# Altium PCB optoFast.PcbDoc
Units mil, origin at the board's own origin, x right, y up, seen from the top; angles counter-clockwise.
Board outline 900 x 1100 mil, 2 copper layers (Top Layer, Bottom Layer), stack 65.792 mil thick; 10 components, 6 nets, 23 pads, 0 vias.
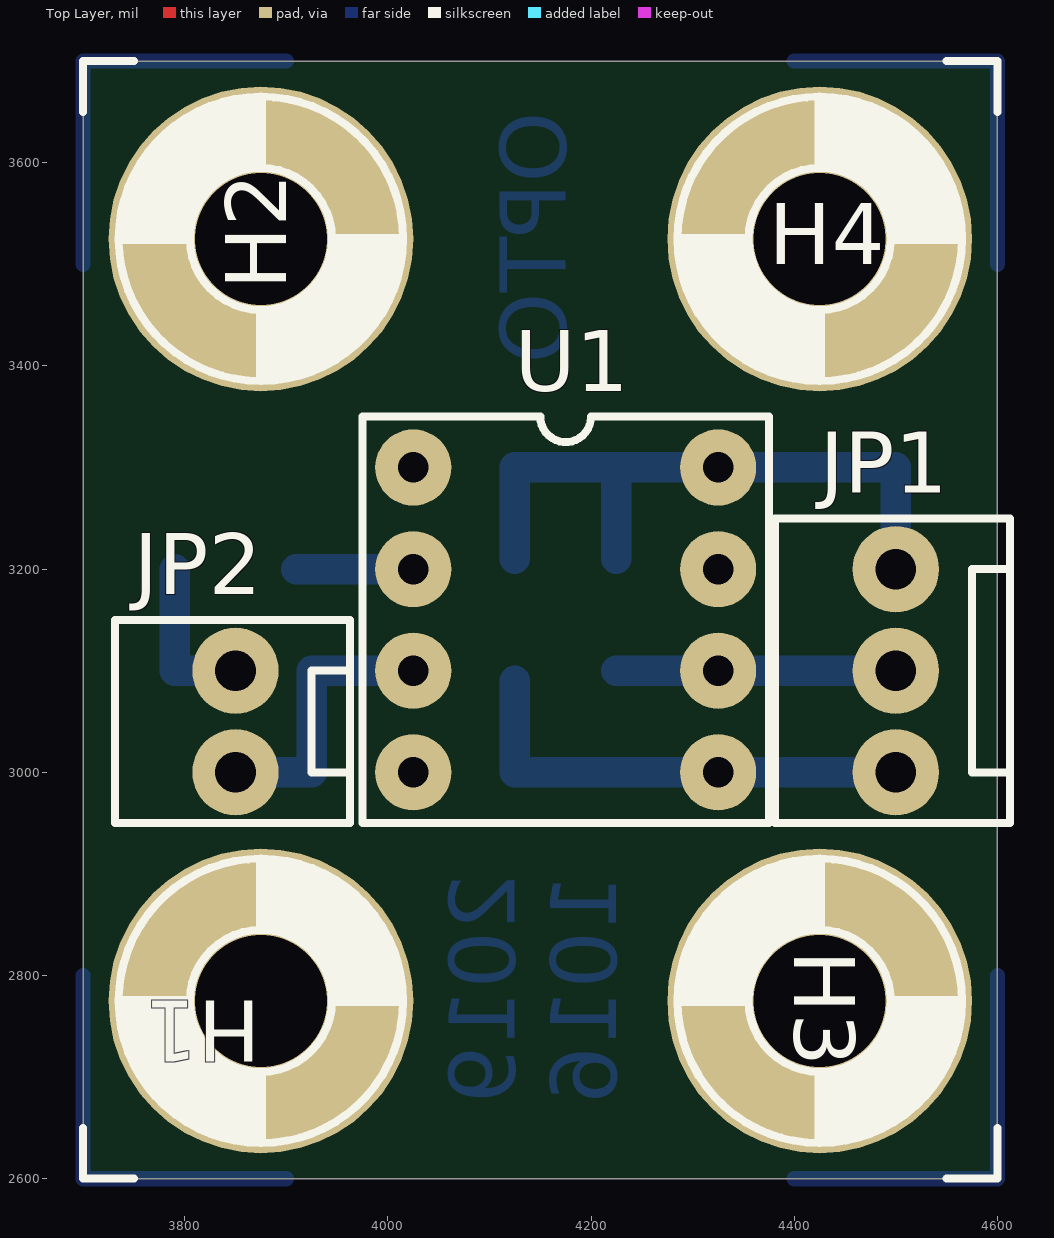
[diagram p0: Top Layer view]
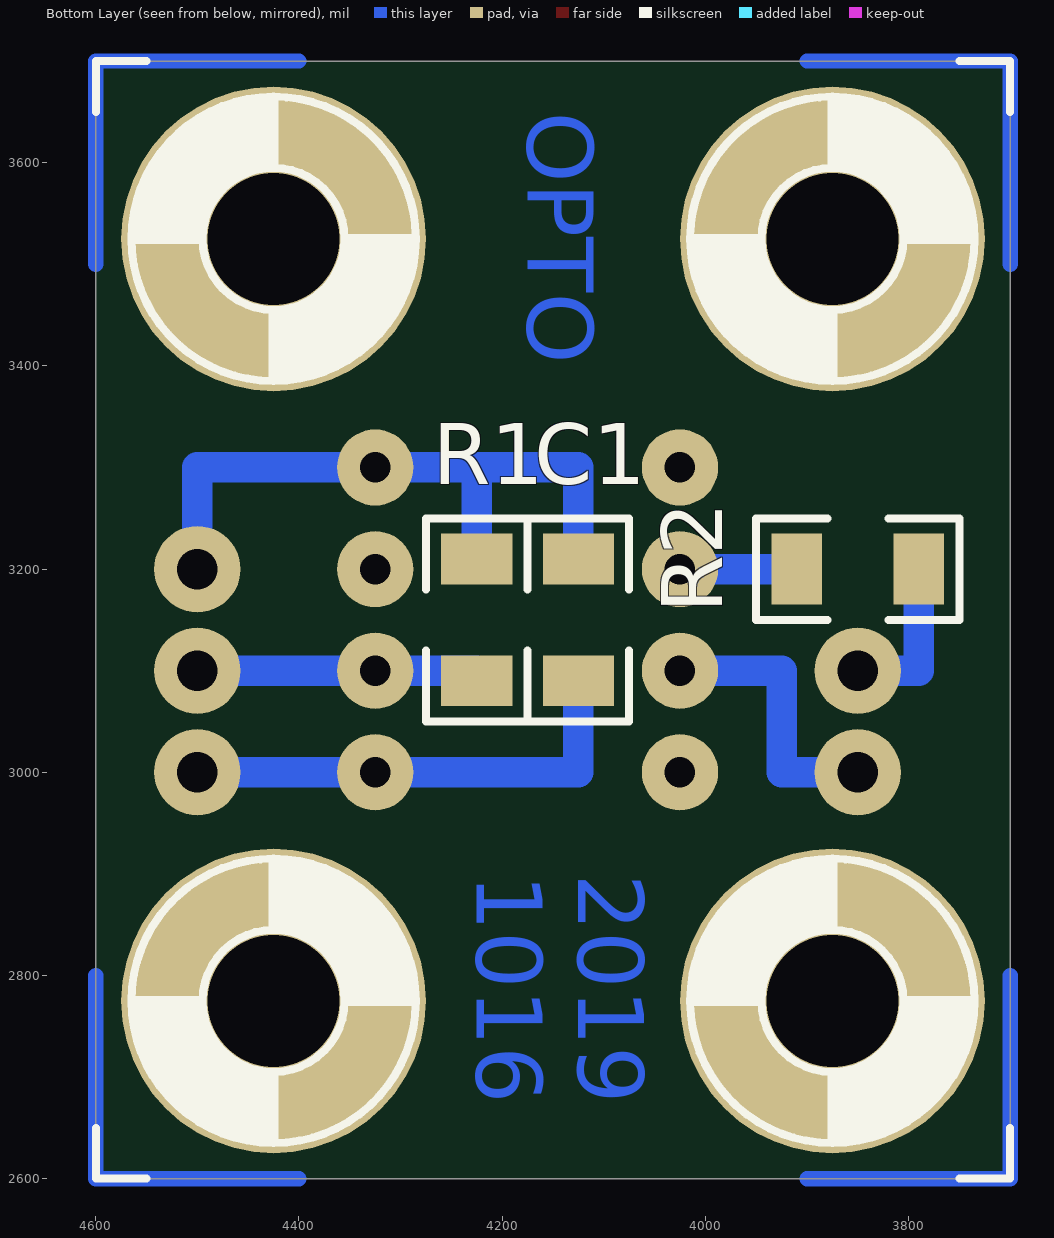
[diagram p1: Bottom Layer view, seen from below]
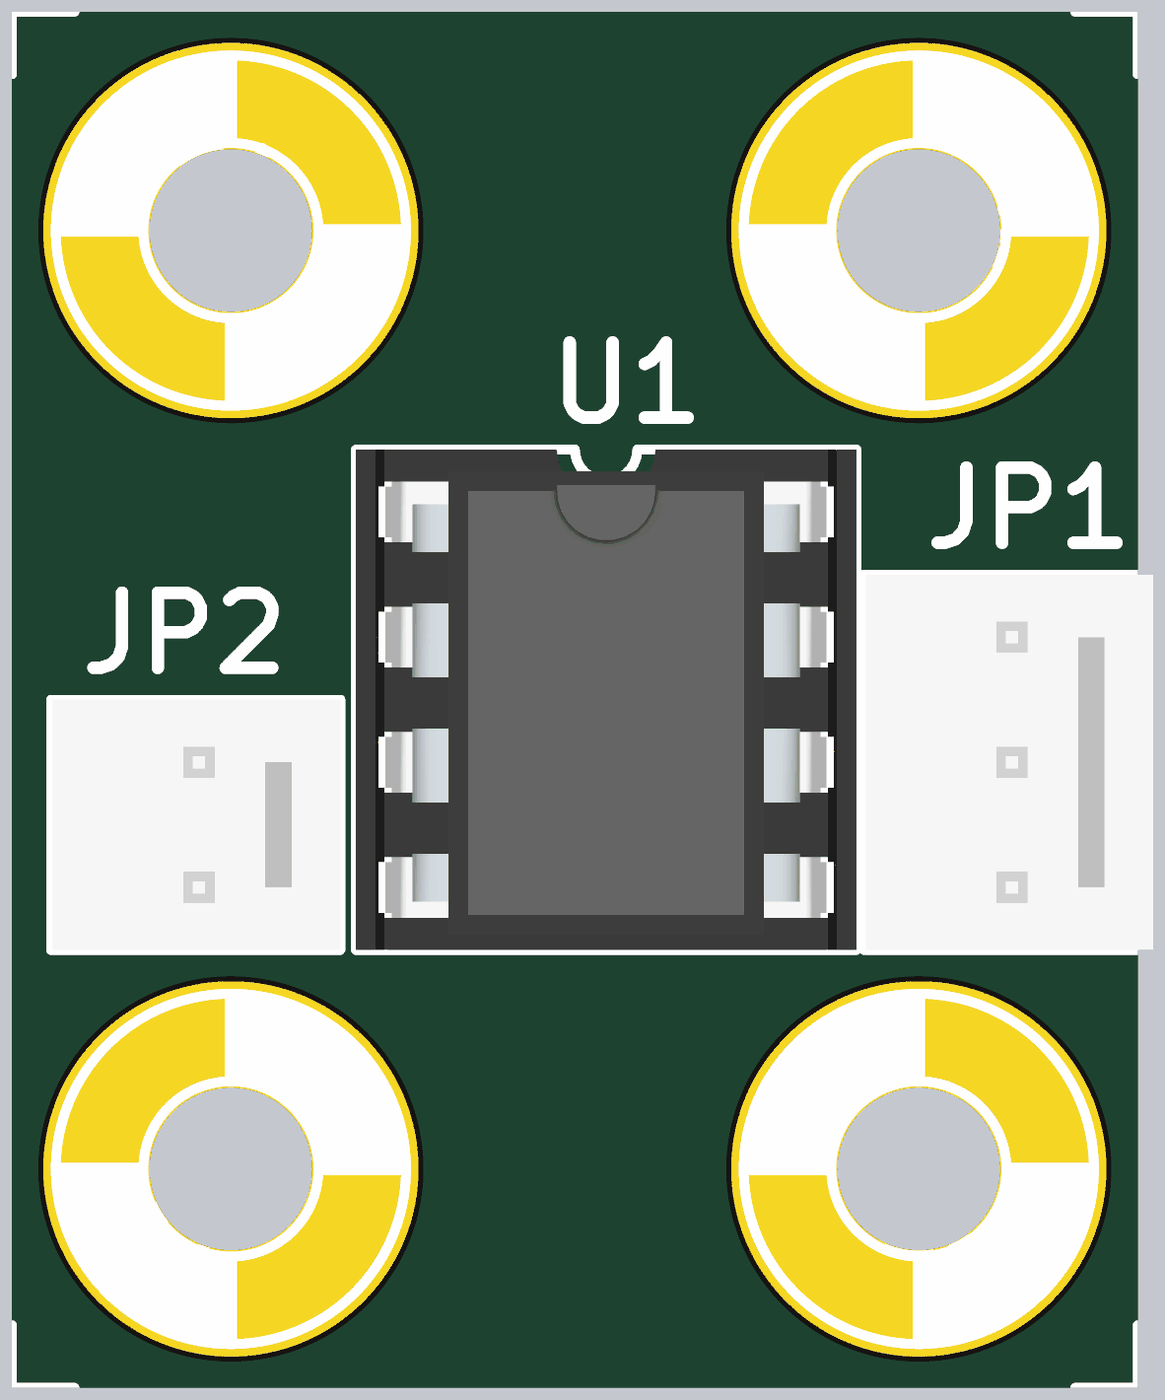
[diagram p2: 3D render of the assembled board from above, using the file's embedded part models]
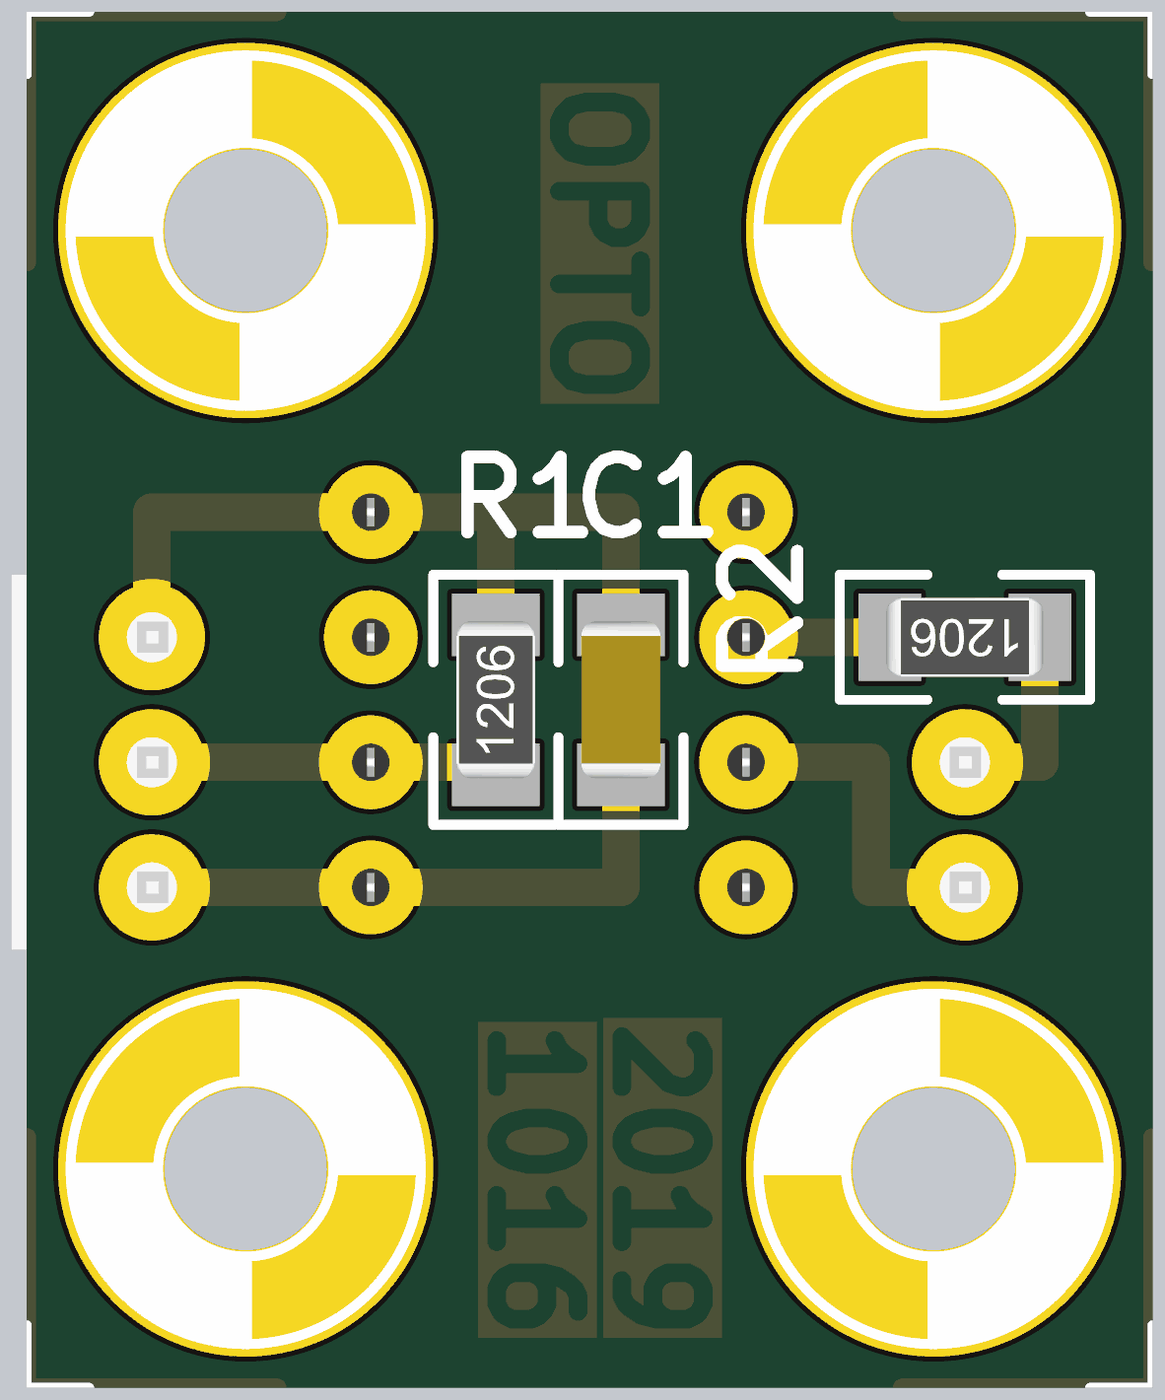
[diagram p3: 3D render of the assembled board from below, using the file's embedded part models]

## Layer stack, top to bottom
Top Layer: signal copper 1.4
Dielectric: core 62.9921, FR-4, Dk 4.8
Bottom Layer: signal copper 1.4

## Board outline
3700,2600 4600,2600 4600,3700 3700,3700

## Design rules (kind name [scope] priority, off if disabled: settings)
Clearance [All] p1: gap=20
PolygonConnect [All] p1: connectstyle=Relief reliefconductorwidth=25 reliefentries=4 polygonreliefangle="90 Angle"
RoomDefinition "PCB OPTO FAST" [InComponentClass('PCB OPTO FAST')] p1: confinementstyle=ConfineIn formatcopy=TRUE lockcomponents=FALSE outline 0,0 2000,0 2000,1000 0,1000
RoutingVias [All] p1: holewidth=28 width=50 viastyle="Through Hole" minholewidth=28 minwidth=50 maxholewidth=28 maxwidth=50
SilkscreenOverComponentPads [All] p1: minsilkscreentomaskgap=10
SolderMaskExpansion [All] p1: expansion=4
Width [All] p1: maxlimit=1000 minlimit=10 preferedwidth=20
27 further rules are at their usual default settings.

## Components (designator, comment, footprint, x,y, rotation, side; value= is the part's Value field where it differs from the comment)
C1 "Capacitor 1206; 100nF; 50V" C1206 4125,3150 r90 bottom
H1 "Agujero de Montaje" agujero 3875,2775 r180 top
H2 "Agujero de Montaje" agujero 3875,3525 r90 top
H3 "Agujero de Montaje" agujero 4425,2775 r270 top
H4 "Agujero de Montaje" agujero 4425,3525 r0 top
JP1 "Header3x1" conpol3x1 4500,3150 r270 top
JP2 "Header2x1" CONPOL2X1 3850,3050 r270 top
R1 "Res" R1206 4225,3150 r90 bottom
R2 "Res" R1206 3850,3200 r0 bottom
U1 "6N137" DIP8Z 4025,3300 r0 top

## Footprints (in the part's own frame and the unit in brackets; to place one, negate y for a bottom-side part, rotate by r counter-clockwise, add the part's x,y. Pads: shape width x height; smd on the part's side, far side on the other; paste and mask are expansions set on the pad)
agujero [mil] "AGUJERO DE MONTAJE"
  round 300 hole 130: 1(0,0)
  silkscreen extent -140,-140 175,175
C1206 [mil]
  rect 50x70 smd: 1(-60,0) 2(60,0)
  silkscreen extent -100,-50 100,50, body extent -63,-31 63,31, height 33
CONPOL2X1 [mil] "CONECTOR POLARIZADO 2x1"
  round 85 hole 40: 1(-50,0) 2(50,0)
  silkscreen extent -100,-119 100,113, body extent -100,-118 100,113, height 460
conpol3x1 [mil] "CONECTOR POLARIZADO 3x1"
  round 85 hole 40: 1(-50,0) 2(50,0) 3(150,0)
  silkscreen extent -100,-119 200,113, body extent -100,-118 200,113, height 460
DIP8Z [mil] "ZOCALO DIP 8"
  round 75 hole 30: 1(0,0) 2(0,-100) 3(0,-200) 4(0,-300) 5(300,-300) 6(300,-200) 7(300,-100) 8(300,0)
  silkscreen extent -50,-350 350,50, body extent -50,-350 350,50, height 311
R1206 [mil]
  rect 50x70 smd: 1(-60,0) 2(60,0)
  silkscreen extent -100,-50 100,50, body extent -63,-31 63,31, height 34

## Part data
JP1: "Header 3x1"
JP2: "Header 2x1"
R1 R2: "Resistor"
U1: "Optoaislador"

## Nets (pads, with @x,y where several pads share a name; then routed paths per layer and width w, separated by ;. In a path a pad name is that pad's centre, name@x,y a point inside that pad or via, vN(x,y) a via of type N, cw(c..) or ccw(c..) an arc to the next point about the centre after c; other vN are vias at no path point)
GND: C1.1 JP1.3 U1.5 | length 465
  Bottom Layer w30: C1.1 4125,3000 U1.5 JP1.3
IN+: JP2.1 R2.1 | length 160
  Bottom Layer w30: R2.1 3790,3100 JP2.1
IN-: JP2.2 U1.3 | length 275
  Bottom Layer w30: JP2.2 3925,3000 3925,3100 U1.3
NetR2_2: R2.2 U1.2 | length 115
  Bottom Layer w30: R2.2 U1.2
OUT: JP1.2 R1.1 U1.6 | length 275
  Bottom Layer w30: R1.1@4225,3100 U1.6 JP1.2
VCC: C1.2 JP1.1 R1.2 U1.8 | length 655
  Bottom Layer w30: C1.2 4125,3300 4225,3300 ; R1.2 4225,3300 ; JP1.1 4500,3300 U1.8 4225,3300
pads on no net: H1.1 H2.1 H3.1 H4.1 U1.1 U1.4 U1.7
copper on no net: | length 1600
  Bottom Layer w15: 3700,2800 3700,2600 3900,2600 ; 3700,3500 3700,3700 3900,3700 ; 4400,2600 4600,2600 4600,2800 ; 4400,3700 4600,3700 4600,3500

## Other copper
Bottom Layer:
  text "OPTO" at 4175,3650 h65 r90
  text "2019" at 4125,2900 h65 r90
  text "1016" at 4225,2900 h65 r90